# EAGLE board TapTempo (EAGLE 6.6.0)
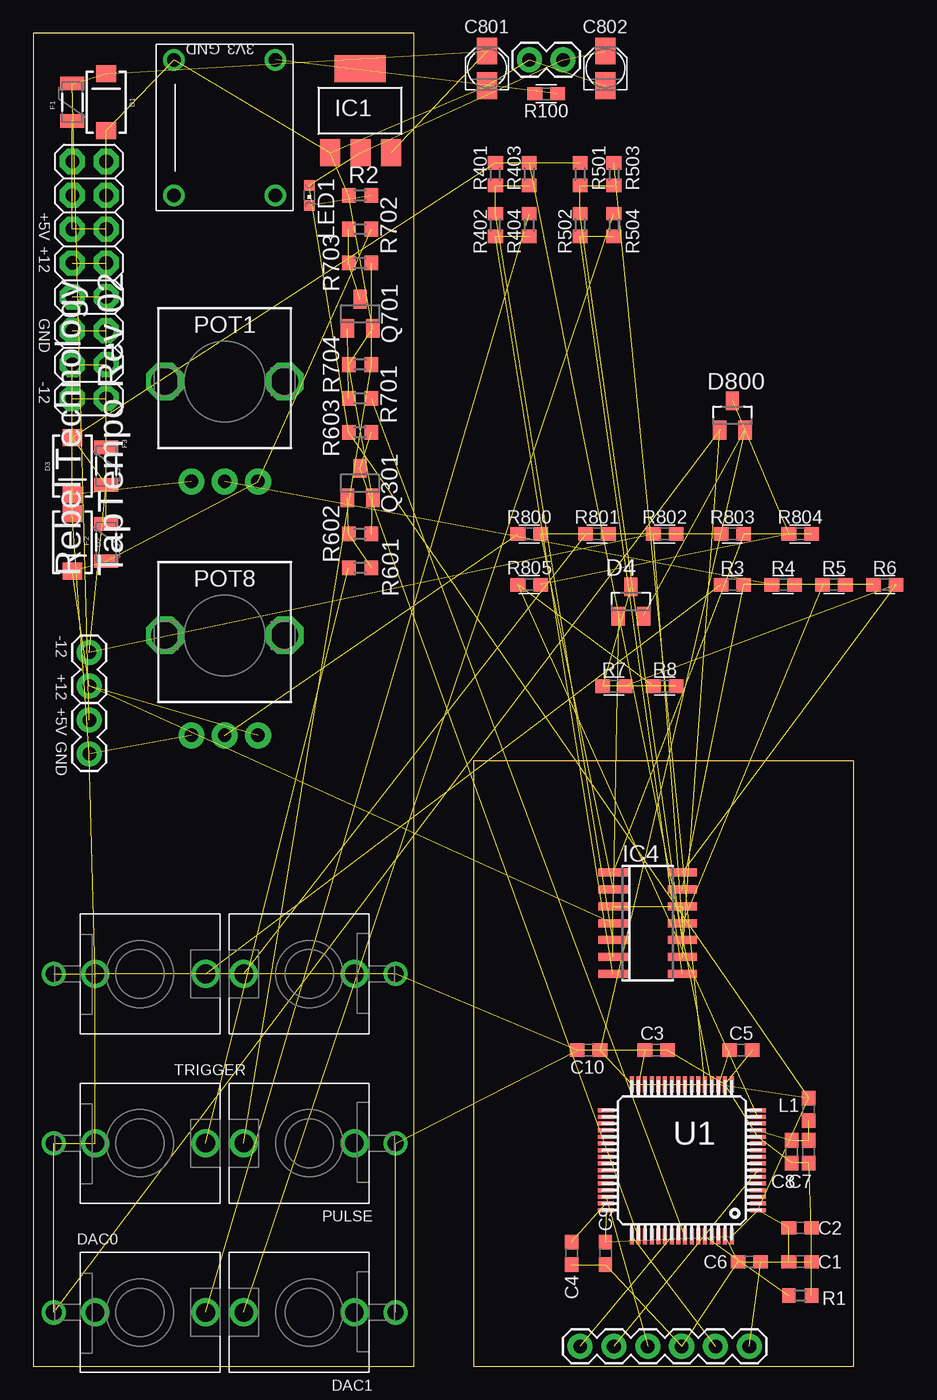
[diagram p0: board, top side]
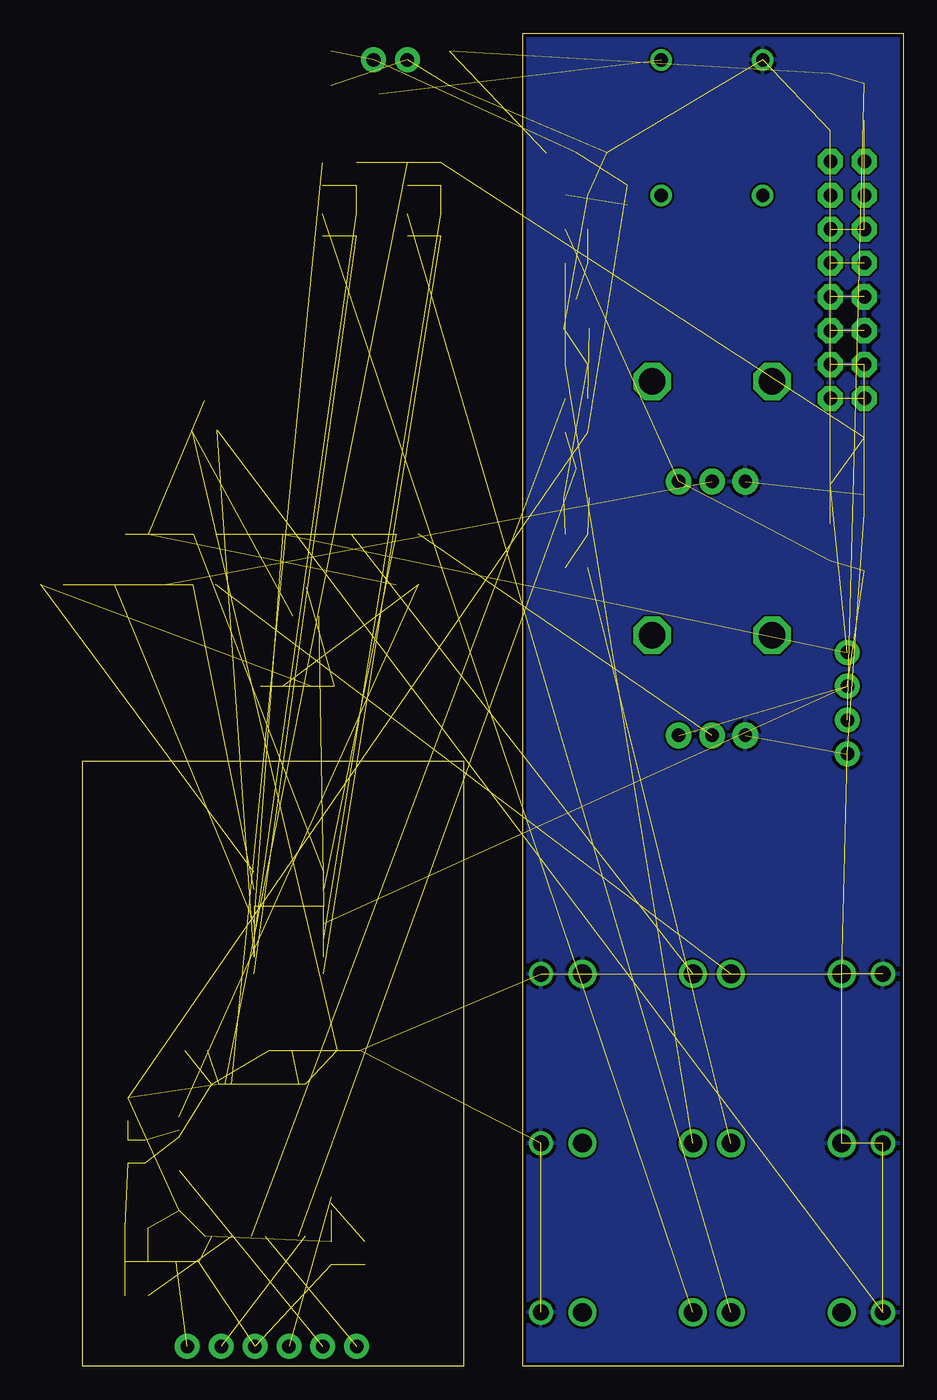
[diagram p1: board, bottom side, seen from below]

Size 61.59 x 100 mm. Coordinates in mm from the lower left corner, seen from the top.
Outline: 28.57,0 28.57,100 0,100 0,0 28.57,0
Outline: 33.02,0 61.59,0 61.59,45.39 33.02,45.39 33.02,0
Copper layers (1*16): Top 0.035mm / dielectric 1.5mm / Bottom 0.035mm
Design rules "Rebel *": minimum track width 6mil, minimum drill 12mil, track to track 6mil, track to pad 6mil, pad to pad 6mil, via to via 6mil, smd to smd 0mil, copper to edge 10mil, drill to drill 10mil, minimum pad ring 12mil, minimum via ring 6mil, stop-mask expansion 2mil, vias tented up to drill 100mil, thermal gap 10mil

## Footprints (pad centres in the part's own frame; a part is rotated, then mirrored left to right if it is on the bottom)
C0603 = smd 1.1 x 1: 1 -0.85,0; 2 0.85,0
PANASONIC_A = smd 2 x 1.5: + 1.3,0; - -1.3,0
SMA-DIODE = smd 1.27 x 1.47: A -2.15,0; C 2.15,0
SOT23 = smd 1 x 1.4: 1 -0.95,-1.1; 2 0.95,-1.1; 3 0,1.1
THONKICONN = drill 1.2: P$1 0,-6.48 | drill 1.4: P$2 0,-3.38; P$3 0,4.92
PTC-1206 = smd 1 x 1.8: 1 -1.4,0; 2 1.4,0
SOT223 = smd 1.499 x 2.007: 1 -2.261,-3.15; 2 0.025,-3.15; 3 2.311,-3.15 | smd 3.81 x 2.007: 4 0,3.15
SO14 = smd 0.6 x 2.2: 1 -3.81,-2.6; 2 -2.54,-2.6; 3 -1.27,-2.6; 4 0,-2.6; 5 1.27,-2.6; 6 2.54,-2.6; 7 3.81,-2.6; 8 3.81,2.6; 9 2.54,2.6; 10 1.27,2.6; 11 0,2.6; 12 -1.27,2.6; 13 -2.54,2.6; 14 -3.81,2.6
1X06 = drill 1.016 pad 1.88: 1 0,0; 2 2.54,0; 3 5.08,0; 4 7.62,0; 5 10.16,0; 6 12.7,0
1X02 = drill 1.016 pad 1.88: 1 0,0; 2 2.54,0
0603@1 = smd 1.1 x 1: 1 -0.85,0; 2 0.85,0
CHIPLED_0603 = smd 0.8 x 0.8: A 0,-0.75; C 0,0.75
POT-ALPS-RK09L1140 = drill 1 pad 1.93: 1 -2.5,-7.5; 2 0,-7.5; 3 2.5,-7.5 | drill 2 octagon: P$5 -4.5,0; P$6 4.5,0
R0603 = smd 1 x 1.1: 1 -0.85,0; 2 0.85,0
0603 = smd 1.1 x 1: 1 -0.85,0; 2 0.85,0
TQFP64 = smd 1.2 x 0.3: 1 -5.7,3.75; 2 -5.7,3.25; 3 -5.7,2.75; 4 -5.7,2.25; 5 -5.7,1.75; 6 -5.7,1.25; 7 -5.7,0.75; 8 -5.7,0.25; 9 -5.7,-0.25; 10 -5.7,-0.75; 11 -5.7,-1.25; 12 -5.7,-1.75; 13 -5.7,-2.25; 14 -5.7,-2.75; 15 -5.7,-3.25; 16 -5.7,-3.75; 33 5.7,-3.75; 34 5.7,-3.25; 35 5.7,-2.75; 36 5.7,-2.25; 37 5.7,-1.75; 38 5.7,-1.25; 39 5.7,-0.75; 40 5.7,-0.25; 41 5.7,0.25; 42 5.7,0.75; 43 5.7,1.25; 44 5.7,1.75; 45 5.7,2.25; 46 5.7,2.75; 47 5.7,3.25; 48 5.7,3.75 | smd 0.3 x 1.2: 17 -3.75,-5.7; 18 -3.25,-5.7; 19 -2.75,-5.7; 20 -2.25,-5.7; 21 -1.75,-5.7; 22 -1.25,-5.7; 23 -0.75,-5.7; 24 -0.25,-5.7; 25 0.25,-5.7; 26 0.75,-5.7; 27 1.25,-5.7; 28 1.75,-5.7; 29 2.25,-5.7; 30 2.75,-5.7; 31 3.25,-5.7; 32 3.75,-5.7; 49 3.75,5.7; 50 3.25,5.7; 51 2.75,5.7; 52 2.25,5.7; 53 1.75,5.7; 54 1.25,5.7; 55 0.75,5.7; 56 0.25,5.7; 57 -0.25,5.7; 58 -0.75,5.7; 59 -1.25,5.7; 60 -1.75,5.7; 61 -2.25,5.7; 62 -2.75,5.7; 63 -3.25,5.7; 64 -3.75,5.7
5GTH9 = drill 1: 1 5.08,3.81; 4 -5.08,-3.81; +3 5.08,-3.81; -2 -5.08,3.81
2X8 = drill 1.016 pad 1.88 octagon: 1 0,0; 2 0,2.54; 3 2.54,0; 4 2.54,2.54; 5 5.08,0; 6 5.08,2.54; 7 7.62,0; 8 7.62,2.54; 9 10.16,0; 10 10.16,2.54; 11 12.7,0; 12 12.7,2.54; 13 15.24,0; 14 15.24,2.54; 15 17.78,0; 16 17.78,2.54

## Placement (x,y rotation side)
C1  1u  [C0603]  57.54,7.84 0 top
C2  100n  [C0603]  57.54,10.38 0 top
C3  2u2  [C0603]  46.75,23.71 0 top
C4  2u2  [C0603]  40.4,8.47 270 top
C5  100n  [C0603]  53.09,23.71 0 top
C6  100n  [C0603]  53.73,7.84 180 top
C7  1u  [C0603]  58.18,16.09 270 top
C8  100n  [C0603]  56.91,16.09 270 top
C9  100n  [C0603]  42.94,8.47 270 top
C10  100n  [C0603]  41.66,23.71 180 top
C801  10u  [PANASONIC_A]  34.05,97.37 90 top
C802  10u  [PANASONIC_A]  42.94,97.37 90 top
D1  [SMA-DIODE]  5.47,94.83 90 top
D2  [SMA-DIODE]  2.93,61.81 270 top
D3  [SMA-DIODE]  2.93,67.53 270 top
D4  BAT54S  [SOT23]  44.84,57.37 0 top
D800  BAT54S  [SOT23]  52.46,71.34 0 top
DAC0  THONKICONN  [THONKICONN]  8.01,4.03 270 top
DAC1  THONKICONN  [THONKICONN]  20.71,4.03 90 top
F1  PTCSMD  [PTC-1206]  2.93,94.83 90 top
F2  PTCSMD  [PTC-1206]  5.47,61.81 270 top
F3  PTCSMD  [PTC-1206]  5.47,67.53 270 top
IC1  REG1117  [SOT223]  24.52,94.2 0 top
IC4  QUAD_OPAMPD  [SO14]  46.11,33.24 270 top
JP1  [1X06]  53.73,1.49 180 top
JP21  [1X02]  39.76,98.01 180 top
JP22  [1X02]  4.2,48.48 270 top
JP23  [1X02]  4.2,51.02 90 top
L1  INDUCTOR  [0603@1]  58.18,19.27 90 top
LED1  [CHIPLED_0603]  20.71,87.85 180 top
POT1  POT-ALPS-RK09L1140  [POT-ALPS-RK09L1140]  14.36,73.88 0 top
POT8  POT-ALPS-RK09L1140  [POT-ALPS-RK09L1140]  14.36,54.83 0 top
PULSE  THONKICONN  [THONKICONN]  20.71,16.73 90 top
Q301  BC846  [SOT23]  24.52,66.26 0 top
Q701  BC846  [SOT23]  24.52,78.96 0 top
R1  10K  [R0603]  57.54,5.3 0 top
R2  1K  [R0603]  24.52,87.85 0 top
R3  100k  [0603]  52.46,58.64 0 top
R4  240k  [0603]  56.27,58.64 0 top
R5  240k  [0603]  60.08,58.64 0 top
R6  68k  [0603]  63.89,58.64 0 top
R7  1k  [0603]  43.57,51.02 0 top
R8  100R  [0603]  47.38,51.02 0 top
R100  150R  [0603]  38.49,95.47 180 top
R401  270k  [R0603]  34.68,89.43 90 top
R402  100k  [R0603]  34.68,85.62 270 top
R403  68k  [R0603]  37.22,89.43 90 top
R404  100R  [R0603]  37.22,85.62 90 top
R501  470k  [R0603]  41.03,89.43 90 top
R502  100k  [R0603]  41.03,85.62 270 top
R503  68k  [R0603]  43.57,89.43 90 top
R504  100R  [R0603]  43.57,85.62 90 top
R601  100K  [R0603]  24.52,59.91 0 top
R602  1M  [R0603]  24.52,62.45 0 top
R603  10K  [R0603]  24.52,70.07 0 top
R701  1K  [R0603]  24.52,72.61 180 top
R702  1K  [R0603]  24.52,85.31 180 top
R703  100  [R0603]  24.52,82.77 0 top
R704  1K  [R0603]  24.52,75.15 0 top
R800  240k  [0603]  37.22,62.45 0 top
R801  100k  [0603]  42.3,62.45 0 top
R802  240k  [0603]  47.38,62.45 0 top
R803  68k  [0603]  52.46,62.45 0 top
R804  1k  [0603]  57.54,62.45 0 top
R805  100R  [0603]  37.22,58.64 0 top
TRIGGER  THONKICONN  [THONKICONN]  8.01,16.73 270 top
TRIGGER1  THONKICONN  [THONKICONN]  20.71,29.43 90 top
TRIGGER2  THONKICONN  [THONKICONN]  8.01,29.43 270 top
U1  STM32F10XRXT6  [TQFP64]  48.65,15.46 180 top
U$1  5GTH9  [5GTH9]  14.36,92.93 90 top
U$2  M08X2  [2X8]  5.47,72.61 90 top
U$3  [RT-LOGO-35MM-BL]  6.42,62.76 90 top

## Library data of the parts
C1-C10 C801 C802 R1 R2 R401-R404 R501-R504 R601-R603 R701-R704 = resistor
D1-D3 F1-F3 JP1 JP21-JP23 U$2 = SparkFun
D4 D800 = diode
DAC0 DAC1 L1 POT1 POT8 PULSE R3-R8 R100 R800-R805 TRIGGER TRIGGER1 TRIGGER2 U$3 = Rebel
IC1 = burr-brown; MPN: REG1117; OC_FARNELL: 1097566; OC_NEWARK: 14P6981
IC4 = adafruit
LED1 = led
Q301 Q701 = transistor
U1 = stm32
U$1 = SWITCH-5GTH9

## Nets
+3V3: C1.1 C2.1 C5.1 C6.1 C9.1 C10.1 C802.+ D4.2 D800.2 IC1.2 JP1.1 JP21.1 L1.2 LED1.A R603.1 U1.1 U1.19 U1.32 U1.48 U1.64
+5V: C801.+ D1.C F1.2 IC1.3 JP22.1
+12V: D2.C F2.2 IC4.4 JP23.1 POT1.3 POT8.3 R702.1
-12V: D3.A F3.2 IC4.11 JP23.2 R5.1 R401.2 R501.2 R802.1
ADC1: U1.11
ADC2: U1.10
ADC3: U1.9
ADC4: R8.1 R805.1 U1.15
ADC5: U1.16
ADC6: U1.8
BOOT0: R1.1 U1.60
DI0: Q301.3 R603.2 U1.50
DI1: U1.28
DO0: R701.1 U1.57
DO1: U1.27
GND: C1.2 C2.2 C3.2 C4.2 C5.2 C6.2 C7.2 C8.2 C9.2 C10.2 C801.- C802.- D1.A D2.A D3.C D4.1 D800.1 DAC0.P$1 DAC1.P$1 IC1.1 IC4.3 IC4.6 IC4.9 IC4.12 JP1.3 JP21.2 JP22.2 POT1.1 POT8.1 PULSE.P$1 Q301.2 Q701.2 R1.2 R2.1 R602.2 R704.1 TRIGGER1.P$1 TRIGGER1.P$2 TRIGGER2.P$1 TRIGGER2.P$2 TRIGGER.P$1 TRIGGER.P$2 U1.12 U1.18 U1.63 U$1.1 U$2.3 U$2.4 U$2.5 U$2.6 U$2.7 U$2.8
N$1: R801.1 TRIGGER1.P$3
N$2: POT8.2 R800.1
N$3: IC4.1 R803.2 R804.2
N$4: R3.1 TRIGGER2.P$3
N$5: IC4.8 R502.2 R504.1
N$6: F3.1 U$2.1 U$2.2
N$7: IC4.7 R402.2 R404.1
N$8: DAC0.P$2
N$9: IC4.13 R3.2 R4.2 R5.2 R6.1
N$10: R100.1 U$1.+3
N$11: POT1.2 R4.1
N$12: IC4.14 R6.2 R7.2
N$13: IC4.5 R401.1 R402.1 R403.1
N$14: D4.3 R7.1 R8.2
N$18: IC4.10 R501.1 R502.1 R503.1
N$19: LED1.C R2.2
N$23: R601.1 TRIGGER.P$3
N$27: Q301.1 R601.2 R602.1
N$29: DAC1.P$2
N$31: DAC0.P$3 R404.2
N$32: DAC1.P$3 R504.2
N$33: IC4.2 R800.2 R801.2 R802.2 R803.1
N$34: Q701.1 R701.2
N$35: PULSE.P$3 R703.2 R704.2
N$36: D800.3 R804.1 R805.2
N$38: Q701.3 R702.2 R703.1
N$44: F1.1 U$2.11 U$2.12
N$45: F2.1 U$2.9 U$2.10
NRST: JP1.5 U1.7
PA0: U1.14
PA3: U1.17
PA4: R403.2 U1.20
PA5: R503.2 U1.21
PA6: U1.22
PA7: U1.23
PA8: U1.41
PA9: U1.42
PA10: U1.43
PA11: U1.44
PA12: U1.45
PB0: U1.26
PB4: U1.56
PB6: U1.58
PB7: U1.59
PB8: U1.61
PB9: U1.62
PB10: U1.29
PB11: U1.30
PB12: U1.33
PB13: U1.34
PB14: U1.35
PB15: U1.36
PC4: U1.24
PC5: U1.25
PC6: U1.37
PC7: U1.38
PC8: U1.39
PC9: U1.40
PC10: U1.51
PC11: U1.52
PC12: U1.53
PC13: U1.2
PC14: U1.3
PC15: U1.4
PD2: U1.54
PE2: U$1.4
PE3: R100.2
PE5: U$1.-2
SWCLK: JP1.2 U1.49
SWDIO: JP1.4 U1.46
SWO: JP1.6 U1.55
VCAP_1: C3.1 U1.31
VCAP_2: C4.1 U1.47
VDDA: C7.1 C8.1 L1.1 U1.13

## Tracks (layer width: path | path; a pad name or v marks a point on that pad's centre or on a via)
+3V3  (19 unrouted)
+5V  (4 unrouted)
+12V  (6 unrouted)
-12V  (7 unrouted)
ADC4  (2 unrouted)
BOOT0  (1 unrouted)
DI0  (2 unrouted)
DO0  (1 unrouted)
GND  (51 unrouted)
  pour Bottom: 29.6,-1.05 -1.51,-1.05 -1.51,99.91 29.6,99.91
N$1  (1 unrouted)
N$2  (1 unrouted)
N$3  (2 unrouted)
N$4  (1 unrouted)
N$5  (2 unrouted)
N$6  (2 unrouted)
N$7  (2 unrouted)
N$9  (4 unrouted)
N$10  (1 unrouted)
N$11  (1 unrouted)
N$12  (2 unrouted)
N$13  (3 unrouted)
N$14  (2 unrouted)
N$18  (3 unrouted)
N$19  (1 unrouted)
N$23  (1 unrouted)
N$27  (2 unrouted)
N$31  (1 unrouted)
N$32  (1 unrouted)
N$33  (4 unrouted)
N$34  (1 unrouted)
N$35  (2 unrouted)
N$36  (2 unrouted)
N$38  (2 unrouted)
N$44  (2 unrouted)
N$45  (2 unrouted)
NRST  (1 unrouted)
PA4  (1 unrouted)
PA5  (1 unrouted)
SWCLK  (1 unrouted)
SWDIO  (1 unrouted)
SWO  (1 unrouted)
VCAP_1  (1 unrouted)
VCAP_2  (1 unrouted)
VDDA  (3 unrouted)

## Text on the board
tPlace: GND | 3V3 | +5V | +12 | GND | -12 | Rebel Technology | TapTempo Rev 02 | -12 | +12 | +5V | GND
bStop: -12